# Altium PCB dAir-aster-0_0_0_2.PcbDoc (part 2 of 2)
Units mm, origin at the board's own origin, x right, y up, seen from the top; angles counter-clockwise.
Board outline 87.04 x 95 mm, 2 copper layers (Top Layer, Bottom Layer); 84 components, 50 nets, 318 pads, 280 vias.
Unrouted connection lines stored in the file: 4.
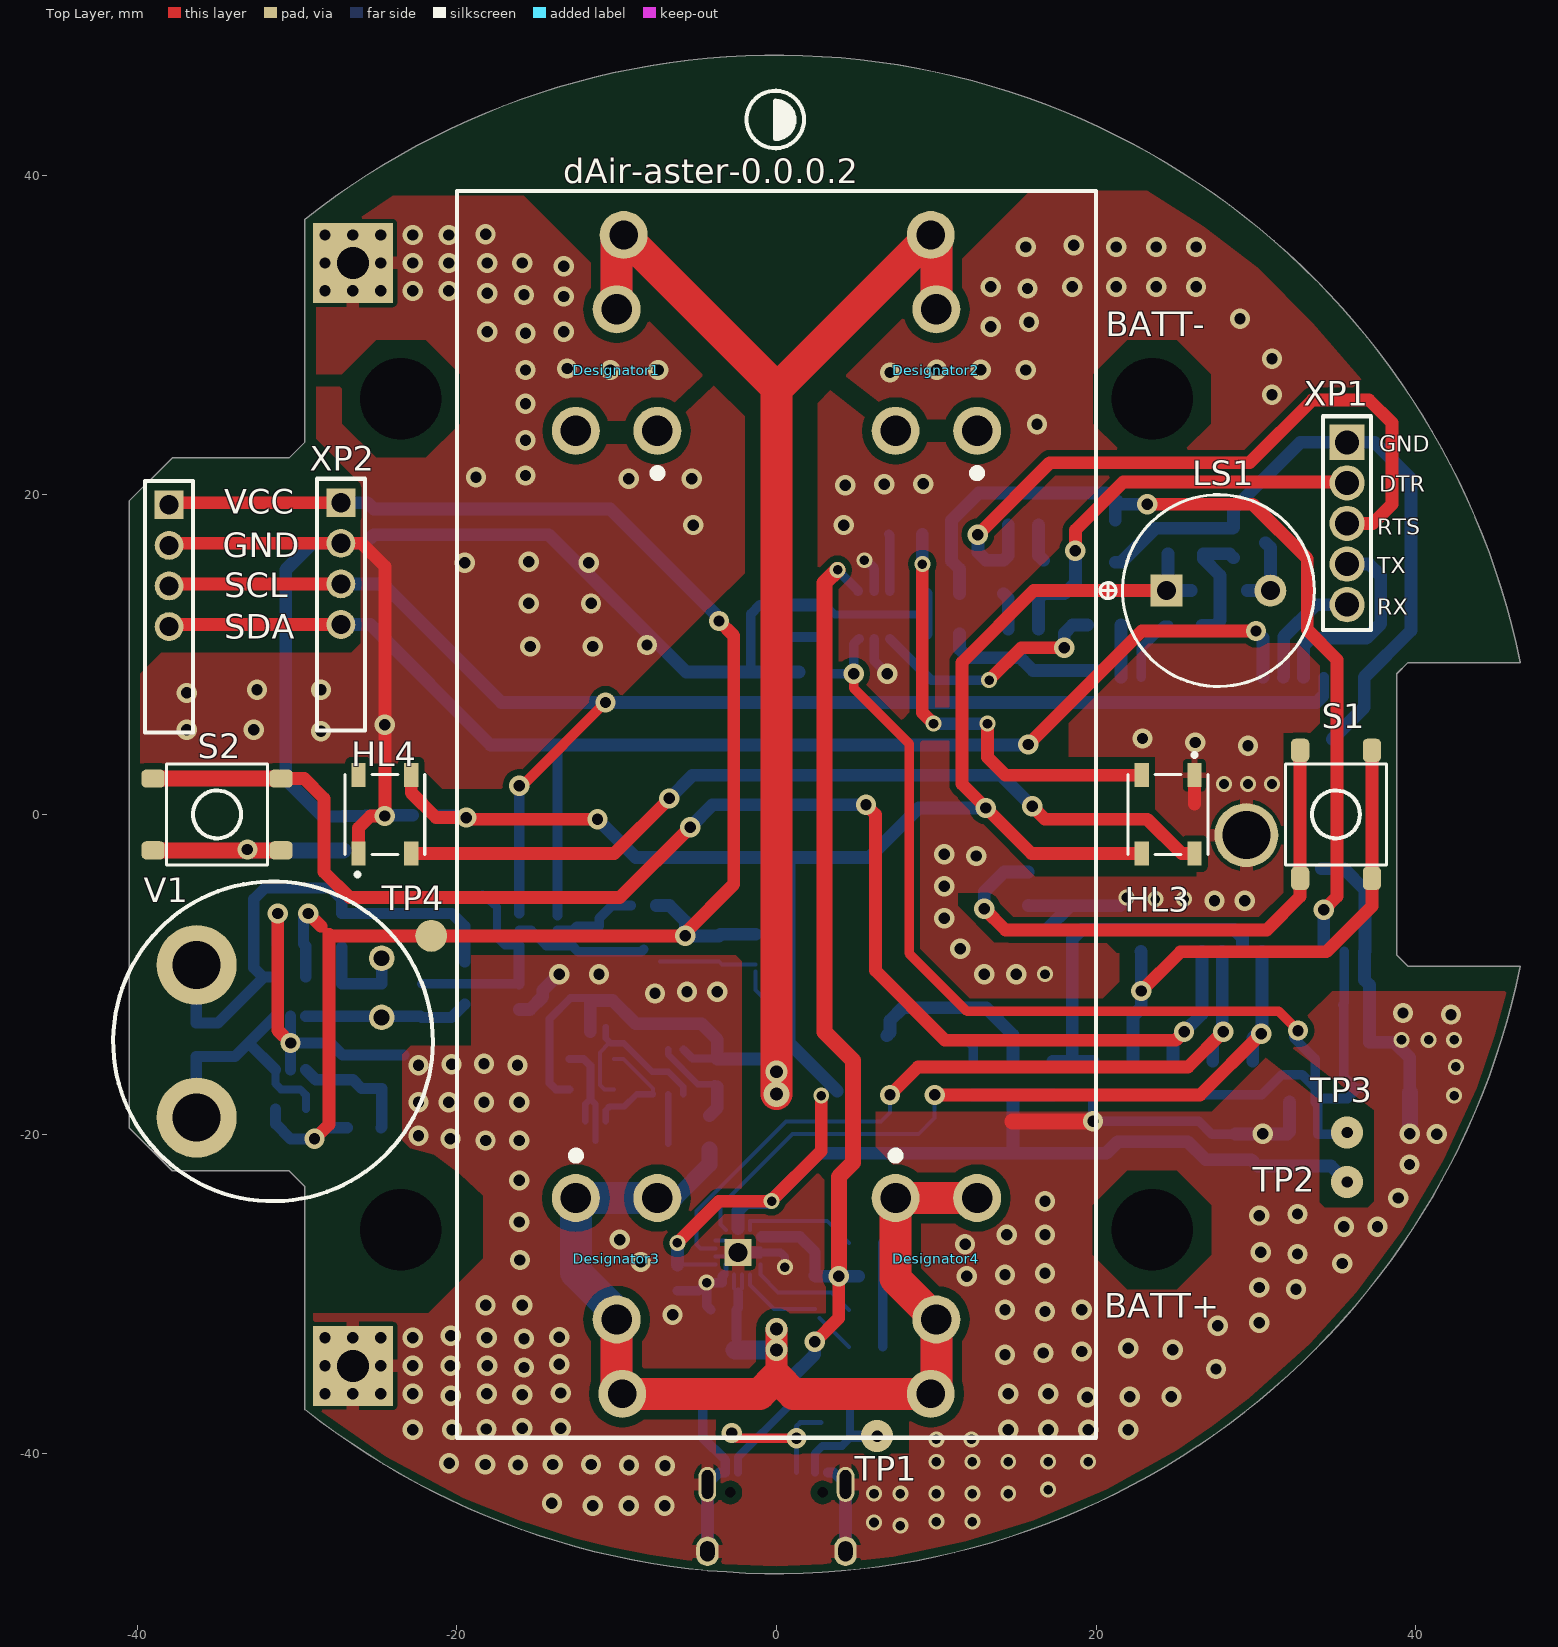
[diagram p0: Top Layer view]

## Other copper (continued)
Bottom Layer: (continued)
  pour cut-out: 10.786,24.73 9.214,24.73 9.214,23.269 10.786,23.269 10.786,23.286 10.786,23.9
  pour cut-out: -9.301,-33.373 -10.7,-33.373 -10.7,-34.689 -9.275,-34.507
  pour cut-out: -18.288,28.163 -18.288,23.912 -21.4,20.8 -25.6,20.8 -28.7,23.9 -28.7,28.2 -25.7,31.2 -21.325,31.2

## Silkscreen, mask and mechanical layers (free items; w line width, h text height)
Top Overlay:
  circle w0.254: c-0.075,43.475 r1.8
  region: -0.075,44.625 -0.075,42.275 0.35,42.275 1.05,42.975 1.05,43.925 0.35,44.625
  lines w0.2: -27,-2.5 -27,2.5 ; -25.3,-2.5 -23.7,-2.5 ; -25.3,2.5 -23.7,2.5 ; -22,-2.5 -22,2.5 ; 22,-2.5 22,2.5 ; 23.7,-2.5 25.3,-2.5 ; 23.7,2.5 25.3,2.5 ; 27,-2.5 27,2.5
  lines w0.254: -0.075,42.25 ccw(c-0.075,43.45) -0.075,44.65 ; -39.5,5.12 -39.5,20.87 -36.5,20.87 -36.5,5.12 -39.5,5.12 ; -28.75,5.25 -25.75,5.25 -25.75,21 -28.75,21 -28.75,5.25 ; -20,-39 -20,39 20,39 20,-39 -20,-39 ; 34.2,11.53 34.2,24.91 37.2,24.91 37.2,11.53 34.2,11.53
  lines w0.3: -0.075,42.275 -0.075,44.625
  lines w0.5: -26.2,-3.75 -26.2,-3.75 ; 26.15,3.725 26.15,3.725
  text "dAir-aster-0.0.0.2" at -13.35,39.475 h1.52
  text "BATT-" at 20.6,29.9 h1.52
  text "XP1" at 32.975,25.55 h1.52
  text "GND" at 37.7,22.7 h1
  text "XP2" at -29.2,21.5 h1.52
  text "DTR" at 37.7,20.2 h1
  text "VCC" at -34.55,18.8 h1.52
  text "RTS" at 37.6,17.5 h1
  text "GND" at -34.65,16.1 h1.52
  text "TX" at 37.6,15.1 h1
  text "SCL" at -34.55,13.6 h1.52
  text "RX" at 37.6,12.5 h1
  text "SDA" at -34.55,11 h1.52
  text "HL4" at -26.6,3 h1.52
  text "TP4" at -24.7,-6 h1.52
  text "HL3" at 21.8,-6.1 h1.52
  text "TP3" at 33.4,-18 h1.52
  text "TP2" at 29.8,-23.6 h1.52
  text "BATT+" at 20.5,-31.5 h1.52
  text "TP1" at 4.9,-41.7 h1.52
Bottom Overlay:
  circle w0.4: c-0.025,42 r3
  circle w0.25: c-0.975,-29.625 r0.125
  region: 0,44.05 0,40 -0.8,40 -1.95,41.15 -1.95,42.85 -0.75,44.05
  lines w0.2: -3.975,-28.69 -3.975,-28.975 -3.69,-28.975 ; -3.975,-26.11 -3.975,-25.825 -3.69,-25.825 ; -1.11,-28.975 -0.825,-28.975 -0.825,-28.69 ; -1.11,-25.825 -0.825,-25.825 -0.825,-26.11
  lines w0.254: 0,39.941 cw(c0,42.012) 0,44.084
  lines w0.3: -0.05,40 0,40 0,44.05 ; -43.75,10.5 -39.75,10.5 -39.75,6.5 -38.25,5 -25.75,5 -25.75,21 -38.25,21 -39.75,19.5 -39.75,15.5 -43.75,15.5 -43.75,10.5
  text "Detecta Group" at 7.4,35.9 h1.2
  text "Safety  / as part / of life" at 4,27 h1.2
  text "TP5" at -17.3,-3.5 h1.52
Mechanical 1:
  lines w1: -29.505,37.225 cw(c0,0) 46.54,9.5 ; -29.5,-37.24 -29.5,-23.3 -30.5,-22.3 -37.8,-22.3 -40.5,-19.6 -40.5,19.6 -37.8,22.3 -30.5,22.3 -29.5,23.3 -29.5,37.225 ; -29.495,-37.233 ccw(c0,0) 46.54,-9.5 ; 46.539,-9.5 39.5,-9.5 38.8,-8.8 38.8,8.8 39.5,9.5 46.539,9.5
Mechanical 2:
  circle w0.254: c-23.5,-26 r3.5
  circle w0.254: c23.5,26 r3.5
  circle w0.254: c-23.5,26 r3.5
  circle w0.254: c23.5,-26 r3.5
  circle w0.254: c-23.5,26 r5
  circle w0.254: c23.5,26 r5
  circle w0.254: c23.5,-26 r5
  circle w0.254: c-23.5,-26 r5
Mechanical 13:
  circle w0.1: c-1.8,-28 r0.5
  lines w0.1: -27,-2.5 -27,2.5 -22,2.5 -22,-2.5 -27,-2.5 ; -3.9,-28.9 -3.9,-25.9 -0.9,-25.9 -0.9,-28.9 -3.9,-28.9 ; 22,-2.5 22,2.5 27,2.5 27,-2.5 22,-2.5
Mechanical 15:
  lines w0.05: -27.1,3.3 -27.1,-3.3 -21.9,-3.3 -21.9,3.3 -27.098,3.3 ; 27.098,-3.3 21.9,-3.3 21.9,3.3 27.1,3.3 27.1,-3.3 ; -4.4,-29.4 -4.4,-25.4 -0.4,-25.4 -0.4,-29.4 -4.4,-29.4
  lines w0.1: -25,0 -24,0 ; -24.5,-0.5 -24.5,0.5 ; -2.9,-27.4 -1.9,-27.4 ; -2.4,-27.9 -2.4,-26.9 ; 24,0 25,0 ; 24.5,-0.5 24.5,0.5